# Altium PCB E32.PcbDoc
Units mil, origin at the board's own origin, x right, y up, seen from the top; angles counter-clockwise.
Board outline 2237.76 x 1475.4 mil, 2 copper layers (Top Layer, Bottom Layer); 27 components, 25 nets, 93 pads, 6 vias.
Unrouted connection lines stored in the file: 1.
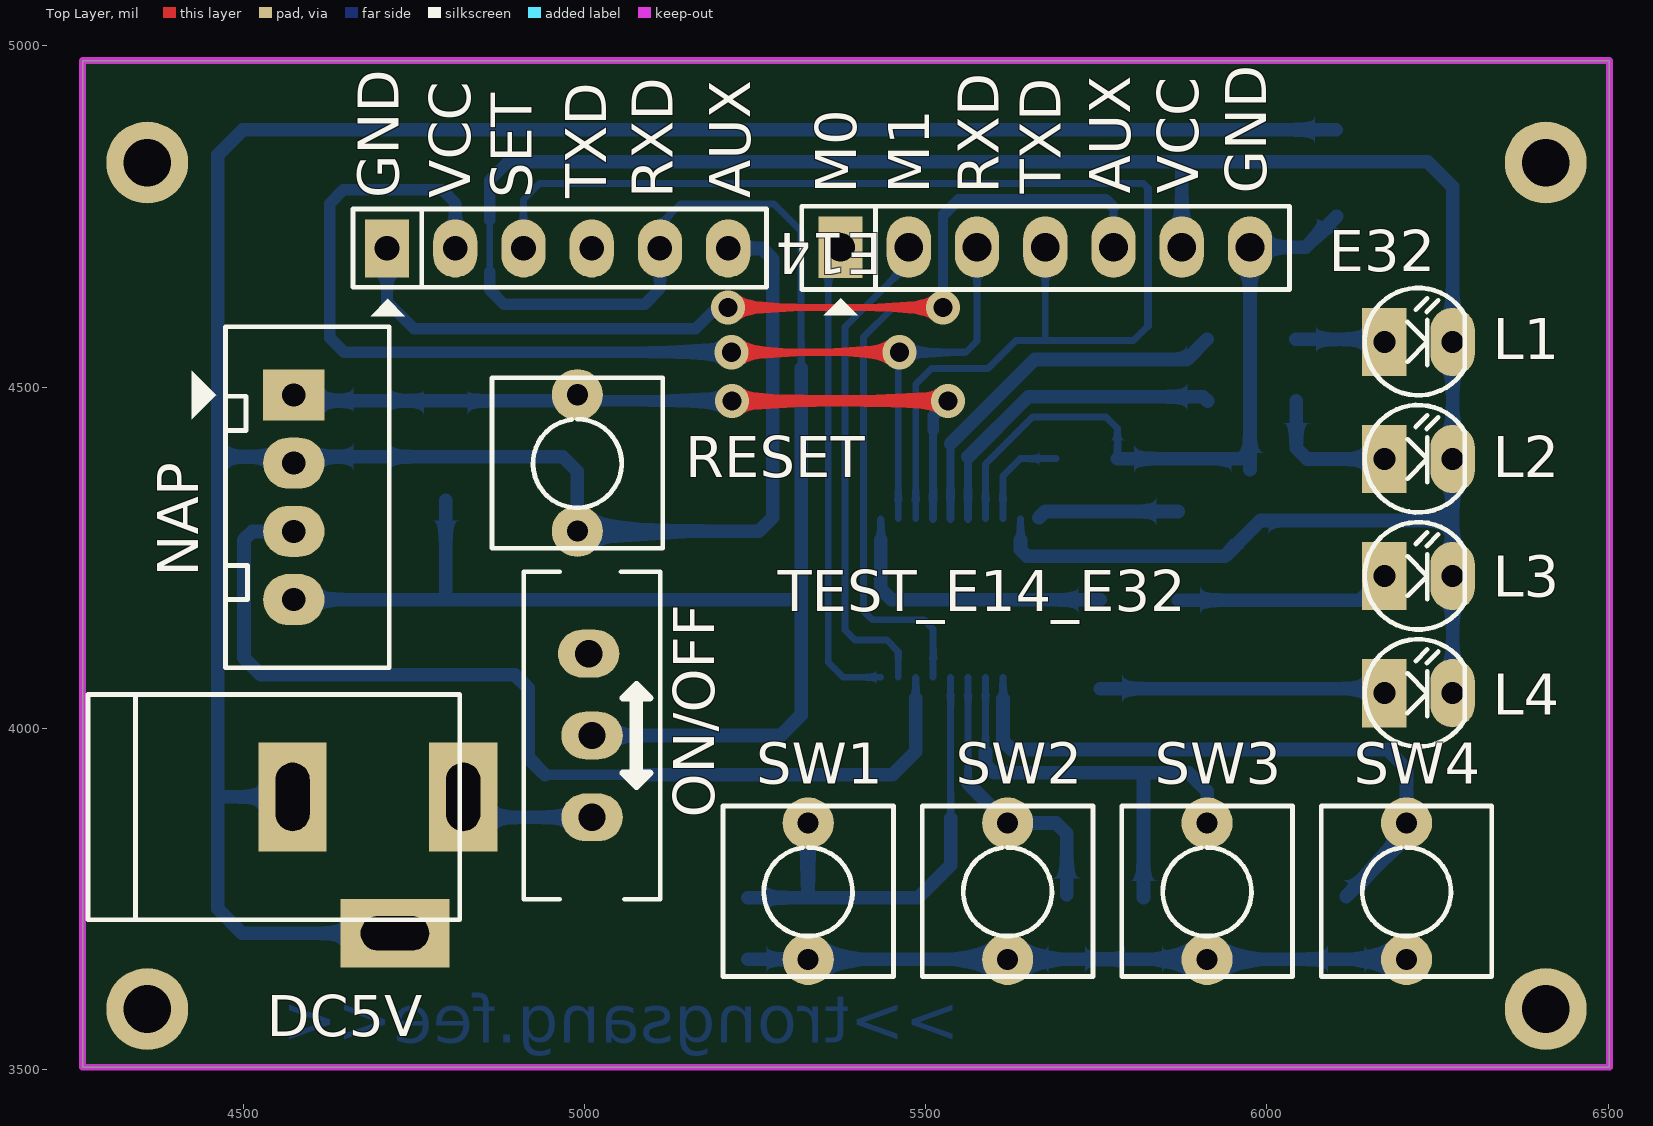
[diagram p0: Top Layer view]
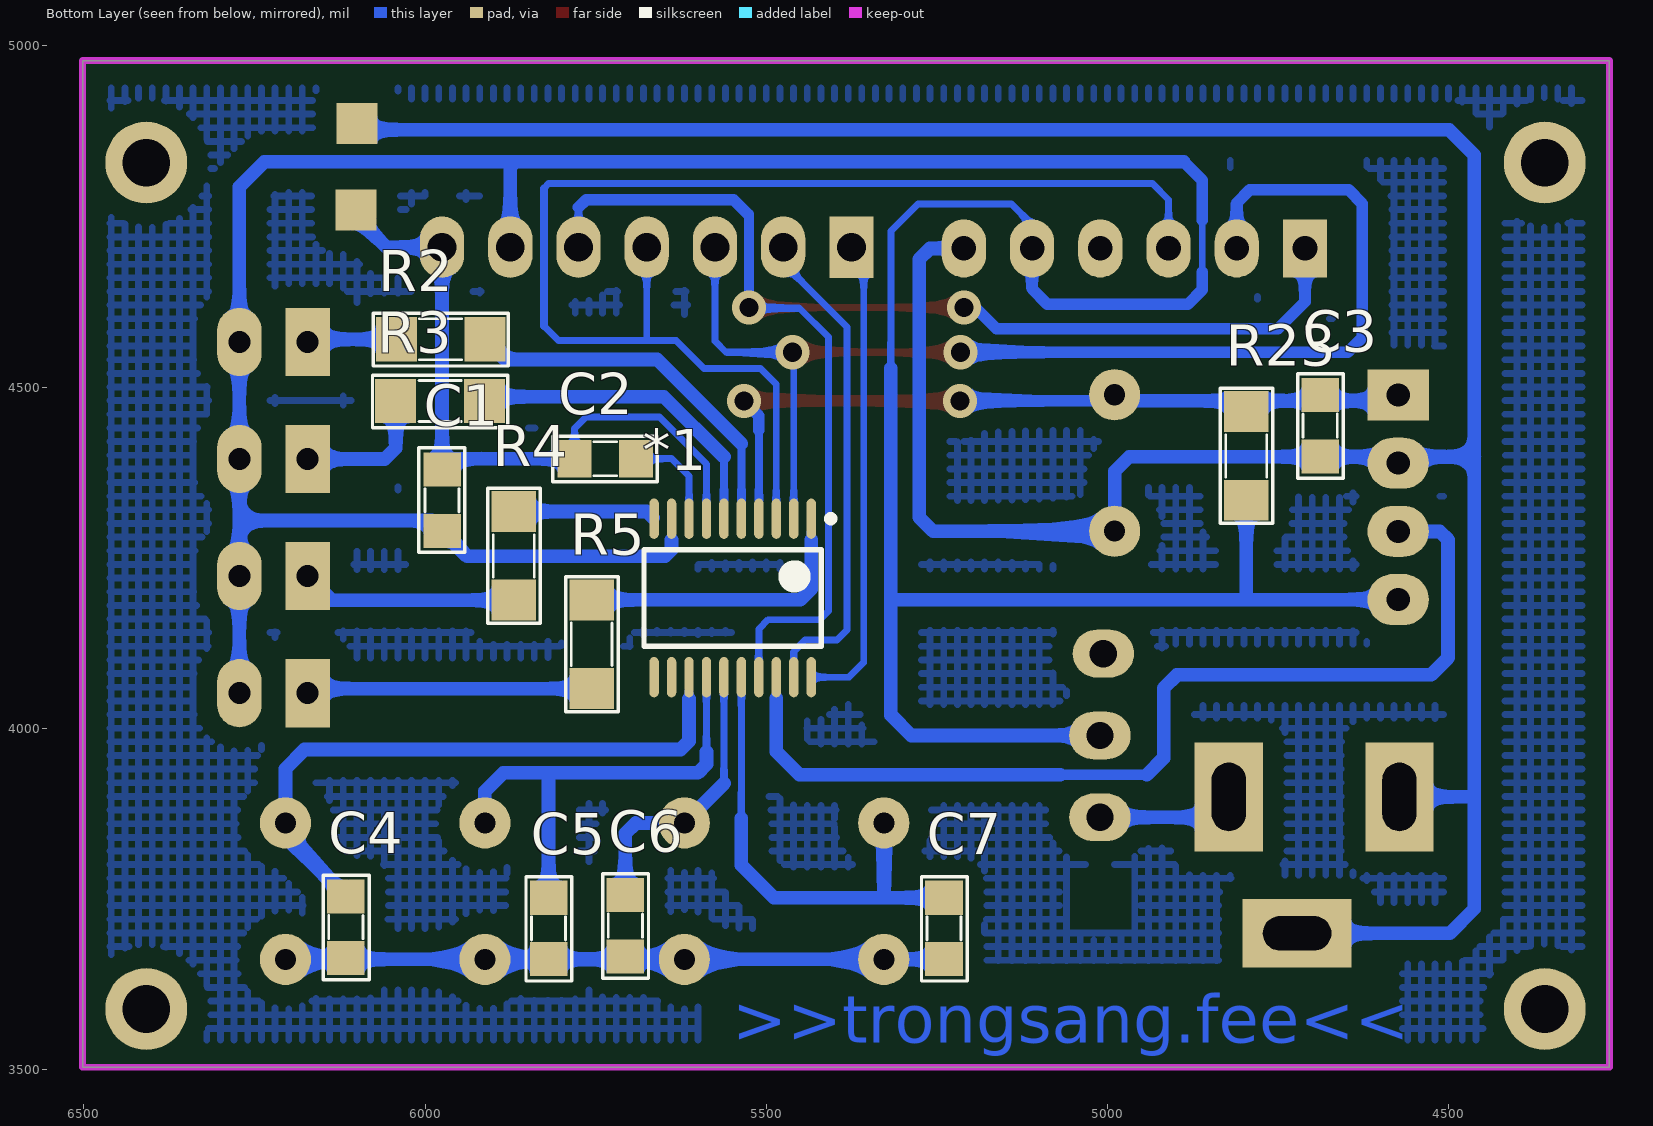
[diagram p1: Bottom Layer view, seen from below]
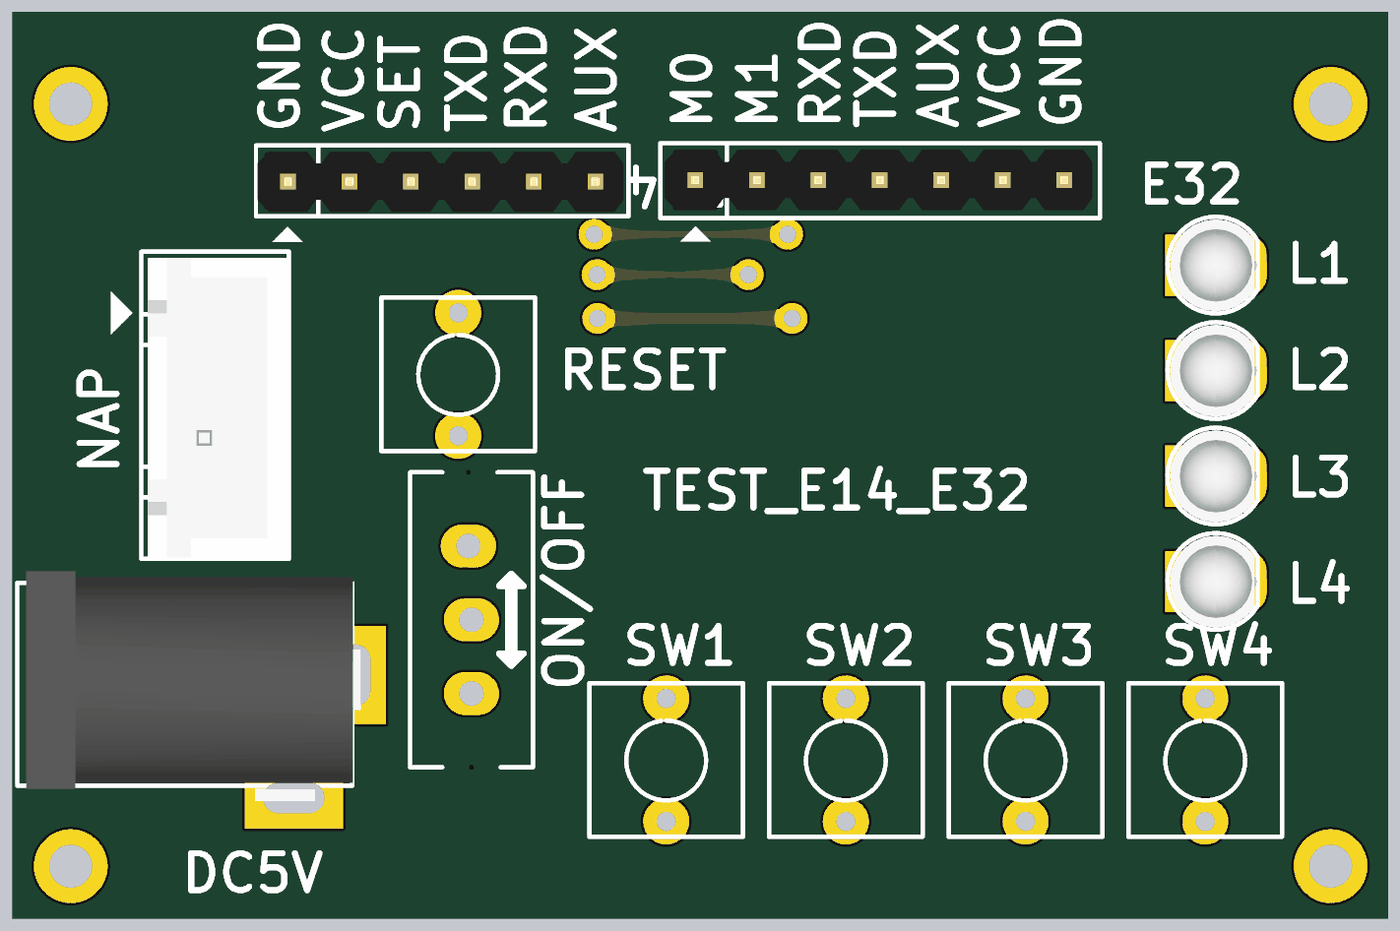
[diagram p2: 3D render of the assembled board from above, using the file's embedded part models]
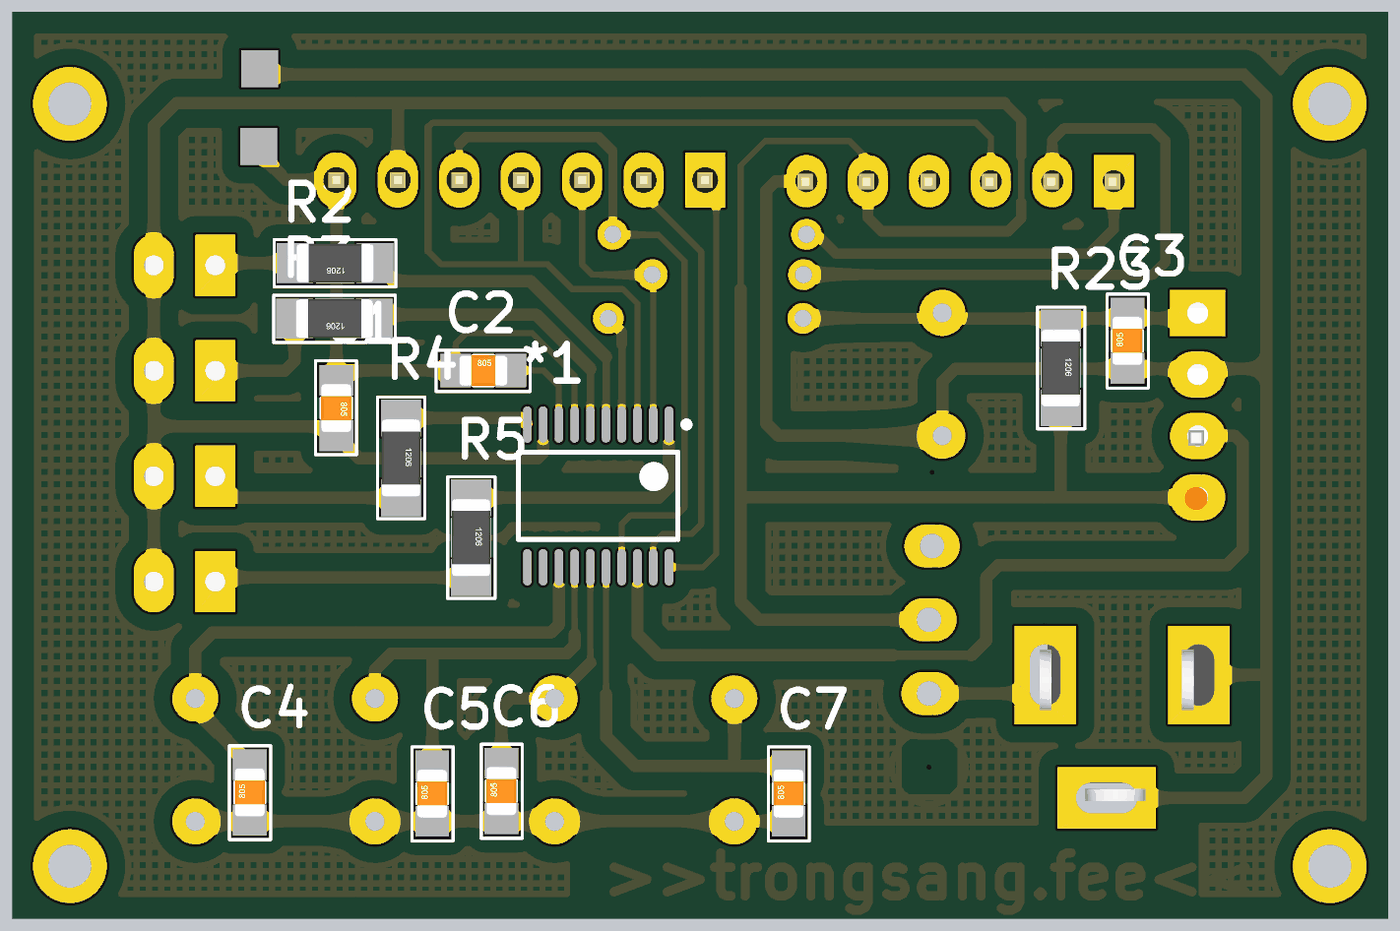
[diagram p3: 3D render of the assembled board from below, using the file's embedded part models]

## Layer stack, top to bottom
Top Solder: solder mask 0.4, Solder Resist, Dk 3.5
Top Layer: signal copper 1.4
Dielectric1: dielectric 12.6, FR-4, Dk 4.8
Bottom Layer: signal copper 1.4
Bottom Solder: solder mask 0.4, Solder Resist, Dk 3.5

## Board outline
4264.32,3503.04 6502.08,3503.04 6502.08,4978.44 4264.32,4978.44

## Design rules (kind name [scope] priority, off if disabled: settings)
Clearance [All] p1: gap=30 ignorepadtopadclearanceinfootprint=FALSE
PolygonConnect [All] p1: connectstyle=Relief reliefconductorwidth=10 reliefentries=4 polygonreliefangle="90 Angle" airgapwidth=10
RoutingVias [All] p1: holewidth=28 width=50 viastyle="Through Hole" minholewidth=28 minwidth=50 maxholewidth=28 maxwidth=50
SolderMaskExpansion [All] p1: expansion=4
Width [All] p1: maxlimit=20 minlimit=10 preferedwidth=17
30 further rules are at their usual default settings.

## Components (designator, comment, footprint, x,y, rotation, side; value= is the part's Value field where it differs from the comment)
*1 "STM8S003F3 UFQFPN20P" TSOP65-20BN 5549.28,4190.88 r270 bottom
C1 "104" SM-CAP-0805 5975.24,4378.88 r270 bottom
C2 "104" SM-CAP-0805 5781,4394.88 r180 bottom
C3 "104" SM-CAP-0805 4688.28,4398.36 r90 bottom
C4 "104" SM-CAP-0805 6116.16,3663.36 r90 bottom
C5 "104" SM-CAP-0805 5819.16,3661.44 r90 bottom
C6 "104" SM-CAP-0805 5706.6,3665.64 r90 bottom
C7 "104" SM-CAP-0805 5239.56,3661.44 r90 bottom
DC5V "Jac DC" DC-IN 4697.12,3799.28 r0 top (schematic designator JDC)
E14 "JP6 PIN" JP6 4710.52,4703.04 r0 top value=JP7 (schematic designator JP1)
E32 "JP7 PIN" JP7 5375.24,4704.96 r0 top value=JP7 (schematic designator JP3)
L1 "LED" LED-3 6172.2,4566.12 r0 top value="LED 3 ly Single Colour" (schematic designator LED1)
L2 "LED" LED-3 6172.2,4394.52 r0 top value="LED 3 ly Single Colour" (schematic designator LED2)
L3 "LED" LED-3 6172.2,4222.92 r0 top value="LED 3 ly Single Colour" (schematic designator LED3)
L4 "LED" LED-3 6172.2,4051.32 r0 top value="LED 3 ly Single Colour" (schematic designator LED4)
NAP "JP4" CON4 4573.92,4488.44 r270 top value="Connector 4" (schematic designator JP2)
ON/OFF "SW102A" SW102T 5008.54,3989.28 r90 top value="Switch 102 On Board" (schematic designator SW1)
R2 "1k" SM-RES-1206 5912.28,4569.84 r0 bottom value="R1/4W - 1K"
R3 "1k" SM-RES-1206 5913.12,4479.48 r0 bottom value="R1/4W - 1K"
R4 "1k" SM-RES-1206 5870.04,4317.64 r270 bottom value="R1/4W - 1K"
R5 "1k" SM-RES-1206 5756.04,4188 r270 bottom value="R1/4W - 1K"
R23 "10k" SM-RES-1206 4796.64,4464.04 r270 bottom value="R1/4W - 1K"
RESET "SW" SW2 4989.48,4288.72 r90 top value="SW chip 2 pin" (schematic designator SW2)
SW1 "SW" SW2 5327.76,3661.08 r90 top value="SW chip 2 pin" (schematic designator SW6)
SW2 "SW" SW2 5620.08,3661.08 r90 top value="SW chip 2 pin" (schematic designator SW5)
SW3 "SW" SW2 5912.4,3661.08 r90 top value="SW chip 2 pin" (schematic designator SW4)
SW4 "SW" SW2 6204.72,3661.08 r90 top value="SW chip 2 pin" (schematic designator SW3)

## Footprints (in the part's own frame and the unit in brackets; to place one, negate y for a bottom-side part, rotate by r counter-clockwise, add the part's x,y. Pads: shape width x height; smd on the part's side, far side on the other; paste and mask are expansions set on the pad)
CON4 [mil] "CON4"
  rect 75x90 hole 34: 1(0,0)
  oval 75x90 hole 34: 2(100,0) 3(200,0) 4(300,0)
  silkscreen extent -100,-150 400,140, body extent -90,-90 398,136, height 276
DC-IN [mil] "Jac DC input"
  rect 100x160 hole 50 slot 100 at 90 deg: 1(125,100) 2(-125,100)
  rect 160x100 hole 50 slot 100 at 0 deg: 3(25,-100)
  silkscreen extent -425,-80 120,250, body extent -410,-105 134,269, height 434
JP6 [mil] "JP6"
  rect 65x85 hole 36: 1(0,0)
  oval 65x85 hole 36: 2(100,0) 3(200,0) 4(300,0) 5(400,0) 6(500,0)
  silkscreen extent -50,-99 556,58, body extent -48,-50 548,48, height 323
JP7 [mil] "JP7"
  rect 65x90 hole 42: 1(0,0)
  oval 65x90 hole 42: 2(100,0) 3(200,0) 4(300,0) 5(400,0) 6(500,0) 7(600,0)
  silkscreen extent -57,-100 658,60, body extent -50,-49 646,49, height 323
LED-3 [mil] "LED 2 PIN, 3ly Only colour"
  rect 65x100 hole 32: 1(0,0)
  oval 65x100 hole 32: 2(100,0)
  silkscreen extent -29,-78 118,79, body extent -25,-75 113,75, height 217
SM-CAP-0805 [mil]
  rect 50x55 smd: 1(0,0) 2(90,0)
  silkscreen extent -32,-34 121,33, body extent 6,-25 84,25, height 31
SM-RES-1206 [mil]
  rect 60x65 smd: 1(0,0) 2(130,0)
  silkscreen extent -34,-38 164,39, body extent 2,-31 128,31, height 40
SW2 [mil] "SW button 2pin, 250x 250 mil"
  round 75 hole 31: 1(0,0) 2(200,0)
  silkscreen extent -25,-125 225,125
SW102T [mil] "Switch 102 On Board To"
  oval 70x90 hole 40: 1(-120,-2.5) 2(0,-2.5) 3(120,2.5)
  round 0 all layers, no hole: 4(240,2.5) 5(-240,-2.5)
  silkscreen extent -240,-103 240,98
TSOP65-20BN [mm] "TSOP, 20-Leads, Body 6.5x4.4mm, Pitch 0.65mm, IPC Medium Density"
  oval 1.5x0.35 smd: 1(-2.95,2.925) 2(-2.95,2.275) 3(-2.95,1.625) 4(-2.95,0.975) 5(-2.95,0.325) 6(-2.95,-0.325) 7(-2.95,-0.975) 8(-2.95,-1.625) 9(-2.95,-2.275) 10(-2.95,-2.925) 11(2.95,-2.925) 12(2.95,-2.275) 13(2.95,-1.625) 14(2.95,-0.975) 15(2.95,-0.325) 16(2.95,0.325) 17(2.95,0.975) 18(2.95,1.625) 19(2.95,2.275) 20(2.95,2.925)
  silkscreen extent -3.07,-3.3 1.8,3.77, body extent -2.25,-3.3 2.25,3.3, height 1.2

## Part data
C1 C2 C3 C4 C5 C6 C7: library part Cap, "Capacitor (Semiconductor SIM Model)"
DC5V: library part DCIN, "Jac DC input"
E14: library part JP6
E32: library part JP7
L1 L2 L3 L4: "LED Single colour Green and Red"
NAP: library part Con4, "Connector 4"
ON/OFF: "Switch 102 on Broad"
R2 R3 R4 R5 R23: library part R, "Resistor 1/4W"
RESET SW1 SW2 SW3 SW4: library part SW2, "Switch button 2 pin"

## Free pads (board coordinates)
  rect 60x60 smd far side: 8(6100.08,4885.92) 9(6101.4,4759.44)
  round 120 hole 70: 10(4359.12,3588.24) 10(4359.12,4828.8) 10(6408.72,3588.24) 10(6408.72,4828.8)

## Via types
v1: diameter 50, hole 28, Top Layer to Bottom Layer, 6 vias

## Nets (pads, with @x,y where several pads share a name; then routed paths per layer and width w, separated by ;. In a path a pad name is that pad's centre, name@x,y a point inside that pad or via, vN(x,y) a via of type N, cw(c..) or ccw(c..) an arc to the next point about the centre after c; other vN are vias at no path point)
AUX: *1.17 E14.1 E32.5 | length 2076.7
  Top Layer w10: v1(5210.4,4616.52) 5510.4,4616.52 v1@5525.4,4631.52
  Bottom Layer w10: v1@5193.96,4616.52 v1(5210.4,4616.52) v1@5211,4617.12 ; v1@5510.4,4615.44 5451.24,4615.44 5408.88,4573.08 5408.88,4171.68 5421.6,4158.96 5497.2,4158.96 5510.89,4145.27 *1.17 ; E32.5 5775.24,4763.4
  Bottom Layer w15: v1@5526.72,4631.76 5525.24,4633.24 5525.24,4751.84 5526.72,4753.32
  Bottom Layer w17: E14.1 4710.52,4624.76 4750.08,4585.2 5162.64,4585.2 v1@5193.96,4616.52 ; 5526.72,4753.32 5548.02,4774.62 5764.02,4774.62 5775.24,4763.4
  other v1: 5525.4,4616.52
BUT1: *1.13 C4.2 SW4.2 | length 925.8
  Bottom Layer w10: 5613.26,4043.16 *1.13
  Bottom Layer w20: 5613.26,4043.16 5613.26,3981.22 5625.84,3968.64 6176.76,3968.64 6204.72,3940.68 SW4.2 6204.72,3841.92 C4.2
BUT2: *1.14 C5.2 SW3.2 | length 699.9
  Bottom Layer w10: 5587.67,3965.57 *1.14 ; 5819.16,3930.72 5822.88,3934.44
  Bottom Layer w20: 5587.67,3965.57 5587.67,3947.05 5600.28,3934.44 5822.88,3934.44 5885.64,3934.44 5912.4,3907.68 SW3.2 ; C5.2 5819.16,3930.72
BUT3: *1.15 C6.2 SW2.2 | length 420.6
  Bottom Layer w10: 5562.08,3919.08 *1.15
  Bottom Layer w20: 5562.08,3919.08 SW2.2 5691.16,3861.08 5706.6,3845.64 C6.2
BUT4: *1.16 C7.2 SW1.2 | length 703.3
  Bottom Layer w10: 5536.48,3868.12 *1.16
  Bottom Layer w20: C7.2 5331.12,3751.44 ; SW1.2 5327.76,3754.8 5331.12,3751.44 ; 5536.48,3868.12 5536.48,3799.12 5488.8,3751.44 5331.12,3751.44
GND: *1.7 C1.1 C2.1 C3.1 DC5V.2 DC5V.3 E14.6 E32.7 NAP.2 pad.8 pad.9 RESET.1 | length 5531.9
  Bottom Layer w10: *1.7 5587.67,4386.83 5656.68,4455.84 5764.2,4455.84 5781,4439.04 5781,4395 C2.1
  Bottom Layer w20: DC5V.2 4462.44,3899.28 4462.32,3899.4 ; DC5V.3 4498.28,3699.28 4462.32,3735.24 4462.32,3899.4 ; E14.6 5260.2,4703.04 5276.04,4687.2 5276.04,4309.2 5255.56,4288.72 RESET.1 4989.48,4376.4 4968.12,4397.76 4462.32,4397.76 ; C2.1@5781,4395 5974.76,4395 C1.1@5975.24,4395.48 ; C1.1 C1.1@5975.24,4395.48 ; pad.8@6101.28,4876.92 4499.28,4876.92 4462.32,4839.96 4462.32,4397.76 ; pad.9@6102.6,4750.44 6057.12,4704.96 E32.7 C1.1@5975.24,4395.48 ; 4462.32,3899.4 4462.32,4397.76
LED1: *1.5 R2.1 | length 549
  Bottom Layer w12: *1.5 5536.48,4416.88
  Bottom Layer w20: 5536.48,4416.88 5659.96,4540.36 5882.8,4540.36 R2.1
LED2: *1.6 R3.1 | length 480.7
  Bottom Layer w12: *1.6 5562.08,4397.6
  Bottom Layer w20: 5562.08,4397.6 5650.2,4485.72 5906.88,4485.72 R3.1
LED3: *1.10 R4.1 | length 210
  Bottom Layer w10: *1.10 *1.10@5665.97,4308.55
  Bottom Layer w20: *1.10@5665.97,4308.55 5675.06,4317.64 R4.1
LED4: *1.1 R5.1 | length 431.5
  Bottom Layer w10: 5434.12,4275.9 *1.1
  Bottom Layer w20: 5434.12,4275.9 5434.12,4204.04 5450.16,4188 R5.1
M0: *1.20 E32.1 | length 702.1
  Bottom Layer w10: E32.1 5357.28,4687 5357.28,4095.96 5378.5,4074.74 *1.20
M1: *1.19 E32.2 | length 728.5
  Bottom Layer w10: *1.19 5459.71,4112.57 5443.08,4129.2 5396.52,4129.2 5381.76,4143.96 5381.76,4588.08 5475.24,4681.56 E32.2
Net*1_8: *1.8 C2.2 | length 150.8
  Bottom Layer w10: *1.8 5613.26,4369.46 5638.8,4395 5690.88,4395 C2.2
NetC4_1: C4.1 C5.1 C6.1 C7.1 SW1.1 SW2.1 SW3.1 SW4.1 | length 1930.6
  Bottom Layer w10: C7.1 5239.92,3661.08 SW1.1 SW2.1 SW3.1 SW4.1
  Bottom Layer w20: C7.1 C5.1 6204.36,3661.44 SW4.1
NetJDC_1: DC5V.1 ON/OFF.1 | length 239.2
  Bottom Layer w10: DC5V.1@4822.12,3861.44 DC5V.1
  Bottom Layer w20: DC5V.1 4852.12,3869.28 ON/OFF.1
NetLED1_1: L1.1 R2.2 | length 131.5
  Bottom Layer w20: R2.2 6168.48,4569.84 L1.1
NetLED2_1: L2.1 R3.2 | length 207.1
  Bottom Layer w10: L2.1@6170.52,4392.84 L2.1
  Bottom Layer w20: R3.2 6043.12,4410.44 6059.04,4394.52 L2.1
NetLED3_1: L3.1 R4.2 | length 316.8
  Bottom Layer w20: R4.2 6136.92,4187.64 L3.1
NetLED4_1: L4.1 R5.2 | length 418.9
  Bottom Layer w20: R5.2 6165.52,4058 L4.1
NRST: *1.4 C3.2 NAP.1 R23.1 RESET.2 | length 1152.8
  Top Layer w17: v1(5216.16,4479.72) v1(5532.72,4479.72)
  Bottom Layer w12: *1.4 5510.89,4436.88
  Bottom Layer w17: RESET.2@4997.92,4479.72 v1(5216.16,4479.72) ; 5510.89,4436.88 5510.89,4457.89 v1(5532.72,4479.72)
  Bottom Layer w20: NAP.1 4582.64,4479.72 RESET.2@4997.92,4479.72 ; v1@5216.16,4488.72 v1@5224.8,4488.72
PD1: *1.18 NAP.3 | length 1489.8
  Bottom Layer w10: 5485.3,4043.62 *1.18
  Bottom Layer w15: 4942.2,3931.68 5069.4,3931.68
  Bottom Layer w20: NAP.3 4513.08,4288.44 4500.96,4276.32 4500.96,4103.04 4525.92,4078.08 4898.28,4078.08 4917.72,4058.64 4917.72,3956.16 4942.2,3931.68 ; 5069.4,3931.68 5451.36,3931.68 5485.3,3965.62 5485.3,4043.62
PD5: *1.2 E14.2 E32.3 | length 1803.1
  Top Layer w10: v1(5215.2,4550.93) v1(5461.39,4550.93)
  Bottom Layer w10: *1.2 v1@5459.71,4544.45 ; v1(5461.39,4550.93) 5559.05,4550.93 5575.24,4567.12 E32.3
  Bottom Layer w17: E14.2 4810.52,4769.68 4791.36,4788.84 4646.64,4788.84 4626.36,4768.56 4626.36,4572.24 4647.67,4550.93 v1(5215.2,4550.93)
PD6: *1.3 E14.3 E32.4 | length 1907.2
  Bottom Layer w10: E14.3 4910.52,4774.44 4934.2,4798.12 5819,4798.12 5826,4791.12 ; *1.3 5485.3,4503.94 5508.6,4527.24 5591.28,4527.24 5632.08,4568.04 5804.64,4568.04 5826,4589.4 ; E32.4 E32.4 5675.24,4572.12
  Bottom Layer w12: 5826,4589.4 5826,4791.12
SET: E14.4
VCC: *1.9 C1.2 E14.5 E32.6 L1.2 L2.2 L3.2 L4.2 NAP.4 ON/OFF.2 R23.2 | length 5689.8
  Bottom Layer w10: 4861.2,4668.6 4861.2,4744.44 ; E14.5 5110.52,4738.28 5140.68,4768.44 5277.48,4768.44 5317.44,4728.48 5317.44,4527.48 ; 5316.88,4188.44 5317.44,4187.88 ; 5638.85,4275.9 *1.9
  Bottom Layer w17: 4861.2,4668.6 4861.2,4642.32 4882.08,4621.44 5088.12,4621.44 5110.52,4643.84 E14.5 ; 4861.2,4744.44 4861.2,4802.76 4888.44,4830
  Bottom Layer w20: NAP.4 4801.2,4188.44 ; R23.2 4796.64,4193 4801.2,4188.44 ; 4888.44,4830 5867.52,4830 ; ON/OFF.2 5287.56,3989.28 5317.44,4019.16 5317.44,4187.88 5317.44,4527.48 ; 5316.88,4188.44 4801.2,4188.44 ; 5638.85,4275.9 5638.85,4261.39 5648.4,4251.84 5938.2,4251.84 C1.2 5990.64,4304.28 6272.2,4304.28 ; E32.6 5875.24,4822.28 5867.52,4830 ; L4.2 L3.2 6272.2,4304.28 ; 5867.52,4830 6235.56,4830 6272.2,4793.36 L1.2 L2.2 6272.2,4304.28
pads on no net: *1.11 *1.12 ON/OFF.3 ON/OFF.4 ON/OFF.5

## Polygon pours and split planes (outlines as drawn)
no net on Bottom Layer "Keep-Out Layer-No Net" (hatched 90Degree grid 20 track 10, pour order 2): 4264.32,4978.44 6502.08,4978.44 6502.08,3503.04 4264.32,3503.04

## Keep-outs
Keep-Out Layer:
  the board outline again, w10

## Other copper
Bottom Layer:
  text ">>trongsang.fee<<" at 5549.88,3539.16 h70

## Silkscreen, mask and mechanical layers (free items; w line width, h text height)
Top Overlay:
  text "M0" at 5398.32,4783.56 h60 r90
  text "M1" at 5505,4783.56 h60 r90
  text "RXD" at 5607.12,4783.56 h60 r90
  text "TXD" at 5697.6,4783.56 h60 r90
  text "AUX" at 5799.6,4783.56 h60 r90
  text "VCC" at 5899.32,4783.56 h60 r90
  text "GND" at 5999.16,4783.56 h60 r90
  text "GND" at 4727.88,4776.6 h60 r90
  text "VCC" at 4832.28,4776.6 h60 r90
  text "SET" at 4922.76,4776.6 h60 r90
  text "TXD" at 5031.72,4776.6 h60 r90
  text "RXD" at 5129.16,4776.6 h60 r90
  text "AUX" at 5242.92,4776.6 h60 r90
  text "TEST_E14_E32" at 5283.12,4171.44 h60